# Altium PCB PCB1.PcbDoc (part 1 of 2)
Units mm, origin at the board's own origin, x right, y up, seen from the top; angles counter-clockwise.
Board outline 68.3 x 41 mm, 2 copper layers (Top Layer, Bottom Layer); 84 components, 72 nets, 284 pads, 49 vias.
Unrouted connection lines stored in the file: 26.
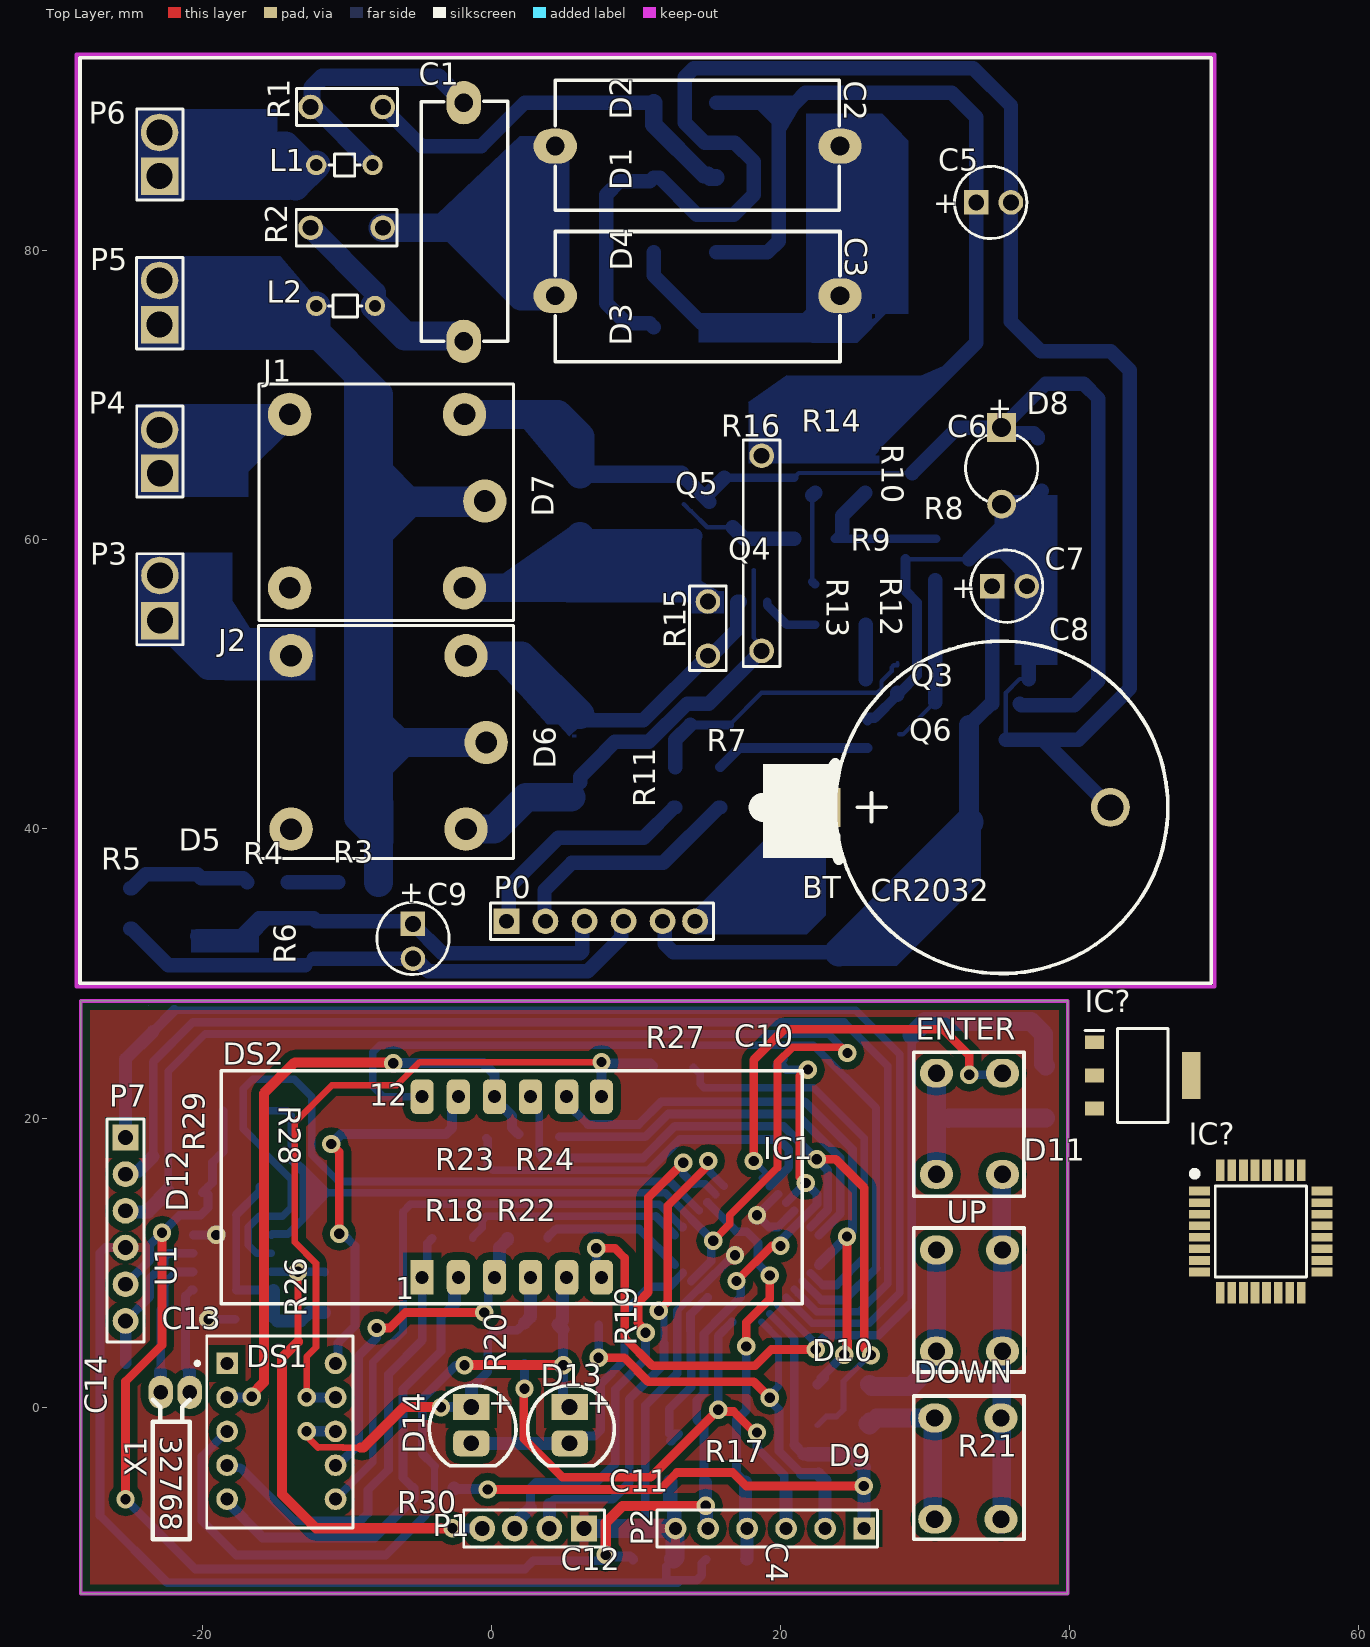
[diagram p0: Top Layer view]
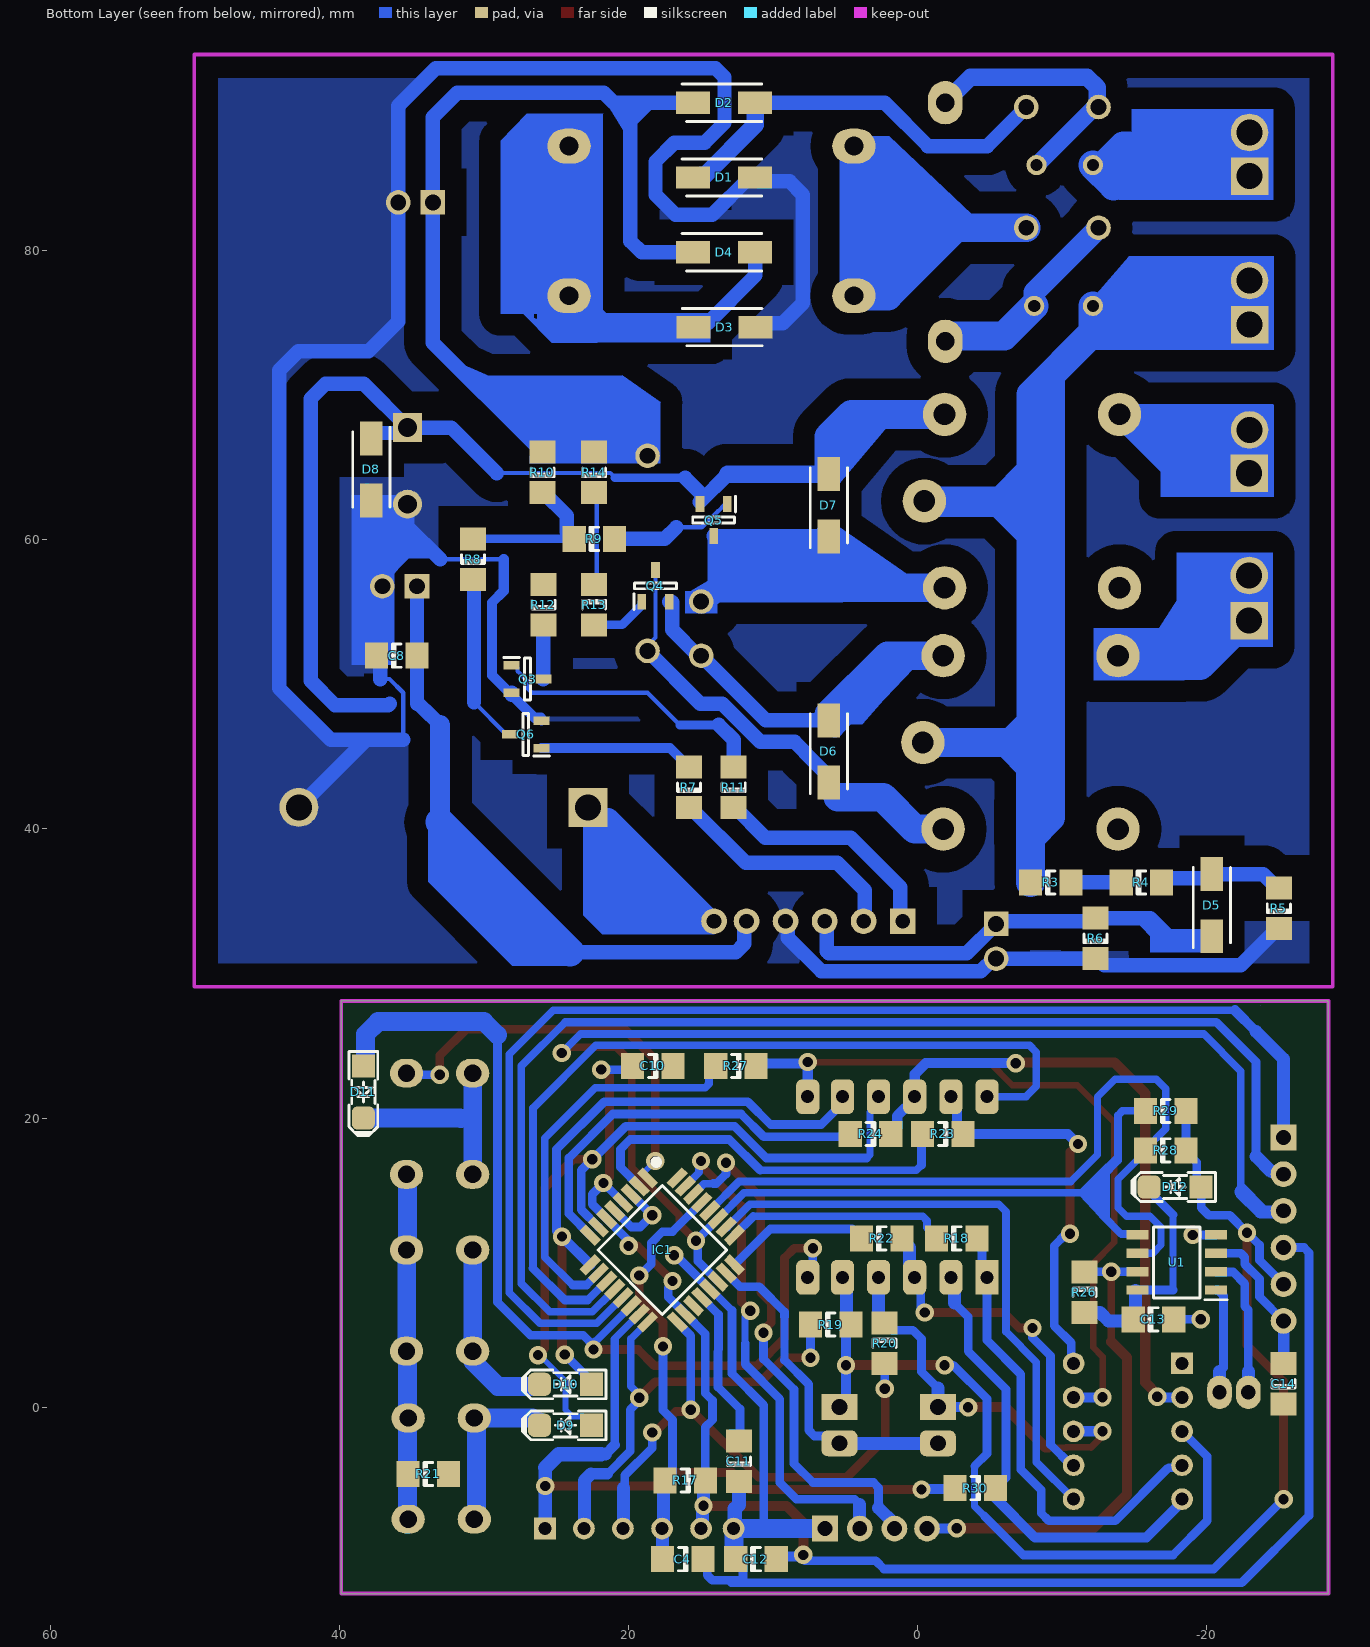
[diagram p1: Bottom Layer view, seen from below]

## Layer stack, top to bottom
Top Solder: solder mask 0.0102, Solder Resist, Dk 3.5
Top Layer: signal copper 0.0356
Dielectric 1: dielectric 0.32, FR-4, Dk 4.8
Bottom Layer: signal copper 0.0356
Bottom Solder: solder mask 0.0102, Solder Resist, Dk 3.5

## Board outline
-28.406,-12.897 -28.406,28.103 39.894,28.103 39.894,-12.897
cut-out: -23.718,27.803

## Design rules (kind name [scope] priority, off if disabled: settings)
Clearance Clearance_8 [InNamedPolygon('GND_L01_P014')] p1: gap=0.508 ignorepadtopadclearanceinfootprint=TRUE
Clearance Clearance_7 [InNamedPolygon('Bottom Layer-No Net')] p2: gap=0.508 ignorepadtopadclearanceinfootprint=TRUE
Clearance Clearance_6 [InNamedPolygon('GND_L02_P008')] p3: gap=1.5 ignorepadtopadclearanceinfootprint=FALSE
Clearance Clearance_5 [InNamedPolygon('GND_L02_P008')] p4: gap=0.254 ignorepadtopadclearanceinfootprint=FALSE except(0: Arc-Hole Track-Hole SMDPad-Hole THPad-Hole Via-Hole Fill-Hole Poly-Hole Region-Hole Text-Hole)
Clearance Clearance_4 [InNamedPolygon('GND_L02_P008')] p5: gap=1.4 ignorepadtopadclearanceinfootprint=FALSE
Clearance Clearance_3 [InNamedPolygon('GND_L02_P008')] p6: gap=0.254 ignorepadtopadclearanceinfootprint=FALSE except(0: Arc-Hole Track-Hole SMDPad-Hole THPad-Hole Via-Hole Fill-Hole Poly-Hole Region-Hole Text-Hole)
Clearance Clearance_2 [InNamedPolygon('GND_L02_P007')] p7: gap=1.4 ignorepadtopadclearanceinfootprint=FALSE
Clearance Clearance_1 [InNamedPolygon('GND_L02_P006')] p8: gap=1.5 ignorepadtopadclearanceinfootprint=FALSE
Clearance [All] p9: gap=0.254 ignorepadtopadclearanceinfootprint=FALSE except(0: Arc-Hole Track-Hole SMDPad-Hole THPad-Hole Via-Hole Fill-Hole Poly-Hole Region-Hole Text-Hole)
PolygonConnect PolygonConnect_4 [All vs IsNamedPolygon('GND_L01_P014')] p1: thpad.connectstyle=Relief thpad.reliefconductorwidth=0.635 thpad.reliefentries=4 thpad.polygonreliefangle="90 Angle" thpad.airgapwidth=0.254 smdpad.connectstyle=Relief smdpad.reliefconductorwidth=0.635 smdpad.reliefentries=4 smdpad.polygonreliefangle="90 Angle" smdpad.airgapwidth=0.254 via.connectstyle=Direct via.reliefconductorwidth=0.254 via.reliefentries=4 via.polygonreliefangle="90 Angle" via.airgapwidth=0.254
PolygonConnect PolygonConnect_3 [All vs IsNamedPolygon('Bottom Layer-No Net 1')] p2: thpad.connectstyle=Relief thpad.reliefconductorwidth=0.635 thpad.reliefentries=4 thpad.polygonreliefangle="90 Angle" thpad.airgapwidth=0.254 smdpad.connectstyle=Relief smdpad.reliefconductorwidth=0.635 smdpad.reliefentries=4 smdpad.polygonreliefangle="90 Angle" smdpad.airgapwidth=0.254 via.connectstyle=Direct via.reliefconductorwidth=0.254 via.reliefentries=4 via.polygonreliefangle="90 Angle" via.airgapwidth=0.254
PolygonConnect PolygonConnect_2 [All vs IsNamedPolygon('Bottom Layer-No Net')] p3: thpad.connectstyle=Relief thpad.reliefconductorwidth=0.635 thpad.reliefentries=4 thpad.polygonreliefangle="90 Angle" thpad.airgapwidth=0.254 smdpad.connectstyle=Relief smdpad.reliefconductorwidth=0.635 smdpad.reliefentries=4 smdpad.polygonreliefangle="45 Angle" smdpad.airgapwidth=0.254 via.connectstyle=Direct via.reliefconductorwidth=0.254 via.reliefentries=4 via.polygonreliefangle="90 Angle" via.airgapwidth=0.254
PolygonConnect PolygonConnect_1 [All vs IsNamedPolygon('GND_L02_P008')] p4: connectstyle=Direct reliefconductorwidth=0.254 reliefentries=4 polygonreliefangle="90 Angle" airgapwidth=0.254
PolygonConnect [All] p5: connectstyle=Relief reliefconductorwidth=0.254 reliefentries=4 polygonreliefangle="90 Angle" airgapwidth=0.254
RoomDefinition Sheet1 [InComponentClass('Sheet1')] p1: confinementstyle=ConfineIn formatcopy=TRUE lockcomponents=FALSE outline 41.021,-11.479 61.647,-11.479 61.647,1.846 41.021,1.846
RoutingVias [All] p1: holewidth=0.711 width=1.27 viastyle="Through Hole" minholewidth=0.711 minwidth=1.27 maxholewidth=0.711 maxwidth=1.27
SolderMaskExpansion [All] p1: expansion=0.102
Width [All] p1: maxlimit=254 minlimit=0.025 preferedwidth=1 minimp=50.000000 maximp=50.000000 favimp=50.000000
30 further rules are at their usual default settings.

## Components (designator, comment, footprint, x,y, rotation, side; value= is the part's Value field where it differs from the comment)
BT "Battery" CR2032 33.81,41.495 r0 top
C1 "Cap" "0.47uf 400v" 1.15,73.317 r90 top value=10nF
C2 "Cap" "1uf 400v"#1 0.078,82.8 r0 top value=330nF
C3 "Cap" "1uf 400v"#2 28.43,81.329 r180 top value=470nF
C4 "Cap" 1206 16.264,-10.522 r0 bottom value=100nF
C5 "Cap Pol1" CAPPR2-5x6.8 34.552,83.345 r0 top value=10uF
C6 "Cap Pol1" CAPPR5-5x5 35.31,64.97 r270 top value=470uF
C7 "Cap Pol1" CAPPR2-5x6.8 35.652,56.795 r0 top value=100uF
C8 "Cap" 1206 36.052,51.985 r180 bottom value=100nF
C9 "Cap Pol1" CAPPR2-5x6.8 -5.418,32.428 r270 top value=47uF
C10 "Cap" 1206 18.344,23.603 r0 bottom value=100nF
C11 "Cap" 1206 12.375,-3.747 r90 bottom value=100nF
C12 "Cap" 1206 11.2,-10.522 r180 bottom value=100nF
C13 "Cap" 1206 -16.3,6.075 r180 bottom value=100pF
C14 "Cap" 1206 -25.3,1.625 r90 bottom value=100nF
D1 "GS1M-LTP" DIOM5226X244N 13.402,85.07 r180 bottom
D2 "GS1M-LTP" DIOM5226X244N 13.402,90.245 r180 bottom
D3 "GS1M-LTP" DIOM5226X244N 13.377,74.72 r180 bottom
D4 "GS1M-LTP" DIOM5226X244N 13.402,79.895 r180 bottom
D5 "GS1M-LTP" DIOM5226X244N -20.343,34.728 r90 bottom
D6 "42A" DIOM5226X244N 6.152,45.37 r90 bottom
D7 "42A" DIOM5226X244N 6.152,62.395 r90 bottom
D8 "38A" DIOM5226X244N 37.808,64.869 r270 bottom
D9 "1N4148" D_SOD80 24.369,-1.256 r0 bottom
D10 "1N4148" D_SOD80 24.369,1.582 r0 bottom
D11 "1N4148" D_SOD80 38.364,21.803 r270 bottom
D12 "1N4148" D_SOD80 -17.798,15.231 r0 bottom
D13 "LED 5mm" LED-1 5.426,-1.397 r0 top
D14 "LED 5mm" LED-1 -1.381,-1.397 r0 top
DOWN "PB-4pin" PB-4pin#1 30.309,-0.372 r270 top
DS1 "Dpy Red-CA" LEDDIP-10/C5.08RHD -15.734,-2.05 r0 top
DS2 "7Segment-4Digit-CA" 7segCA -23.054,4.587 r0 top
ENTER "PB-4pin" PB-4pin#1 30.42,23.483 r270 top
IC1 "ATMEGA168-15AD" QFP80P900X900X120-32N 17.679,10.872 r225 bottom
IC? "AMS1117-3.3" SOT229P700X180-4N 45.075,22.95 r0 top
IC? "STM32F030K6T6TR" QFP80P900X900X160-32N 53.237,12.15 r0 top
J1 "HF3FD_476-583" HF3FD -0.448,62.685 r180 top
J2 "HF3FD_476-583" HF3FD -0.348,45.985 r180 top
L1 "Inductor" AXIAL-0.3#1 -8.299,85.931 r180 top value=100mH
L2 "Inductor" AXIAL-0.3#2 -8.299,76.184 r180 top value=100mH
P0 "Header 6" HDR1X6#1 1.402,33.62 r0 top
P1 "Header 4" HDR1X4 6.989,-8.397 r180 top
P2 "Header 6" HDR1X6#2 25.45,-8.397 r180 top
P3 "Header 2" HDR1X2#1 -22.135,55.155 r90 top
P4 "Header 2" HDR1X2#2 -22.673,64.891 r90 top
P5 "Header 2" HDR1X2#3 -22.948,75.405 r90 top
P6 "Header 2" HDR1X2#4 -22.948,85.641 r90 top
P7 "Header 6" HDR1X6#3 -25.3,18.66 r270 top
Q3 "C945" SOT95P240X110-3N 27.002,50.37 r180 bottom
Q4 "C945" SOT95P240X110-3N 18.152,56.82 r90 bottom
Q5 "C945" SOT95P240X110-3N 14.127,61.37 r270 bottom
Q6 "C945" SOT95P240X110-3N 27.127,46.545 r0 bottom
R1 "47R" RAD-0.1#1 -8.768,89.945 r0 top
R2 "47R" RAD-0.1#1 -11.228,81.595 r180 top
R3 "120k" 1206 -9.193,36.303 r180 bottom
R4 "120k" 1206 -15.468,36.303 r180 bottom
R5 "330k" 1206 -24.968,34.503 r90 bottom
R6 "1.5k" 1206 -12.293,32.428 r90 bottom
R7 "6.8K" 1206 15.841,42.885 r90 bottom
R8 "4.7K" 1206 30.777,58.67 r90 bottom
R9 "6.8K" 1206 22.377,60.07 r180 bottom
R10 "15K" 1206 25.977,64.67 r90 bottom
R11 "6.8K" 1206 12.741,42.885 r90 bottom
R12 "4.7K" 1206 25.902,55.52 r90 bottom
R13 "6.8K" 1206 22.402,55.52 r270 bottom
R14 "15K" 1206 22.402,64.67 r90 bottom
R15 "82R" RAD-0.1#2 14.991,53.255 r270 top
R16 "82R" RAD-0.1#3 18.702,64.447 r90 top
R17 "47K" 1206 16.088,-5.07 r0 bottom
R18 "680R" 1206 -2.681,11.679 r180 bottom
R19 "680R" 1206 6.026,5.71 r180 bottom
R20 "680R" 1206 2.3,4.425 r270 bottom
R21 "2.2K" 1206 33.864,-4.622 r180 bottom
R22 "680R" 1206 2.508,11.679 r180 bottom
R23 "680R" 1206 -1.725,18.9 r0 bottom
R24 "680R" 1206 3.275,18.9 r0 bottom
R26 "4.7K" 1206 -11.524,7.942 r270 bottom
R27 "680R" 1206 12.586,23.602 r0 bottom
R28 "4.7K" 1206 -17.155,17.766 r180 bottom
R29 "4.7K" 1206 -17.155,20.494 r180 bottom
R30 "680R" 1206 -3.981,-5.604 r0 bottom
U1 "DS1340Z-33+" SOIC127P600X175-8N -17.913,10.01 r0 bottom
UP "PB-4pin" PB-4pin#2 29.658,11.253 r270 top
X1 "XTAL" XTAL2 -20.867,1.025 r180 top

## Footprints (in the part's own frame and the unit in brackets; to place one, negate y for a bottom-side part, rotate by r counter-clockwise, add the part's x,y. Pads: shape width x height; smd on the part's side, far side on the other; paste and mask are expansions set on the pad)
"0.47uf 400v" [mm] "18*6mm"
  oval 3x2.4 hole 1.3: 1(0.418,3.048) 2(16.928,3.048)
  silkscreen extent 0.42,0 17.02,6
"1uf 400v"#1 [mm] "24*9mm"
  oval 3x2.4 hole 1.3: 1(4.349,4.445) 2(24.049,4.445)
  silkscreen extent 4.35,0 24,9
"1uf 400v"#2 [mm] "24*9mm"
  oval 3x2.4 hole 1.3: 1(4.303,4.445) 2(24.003,4.445)
  silkscreen extent 4.3,0 24,9
7segCA [mm] "7seg-CA; 12 Leads"
  rect 1.6x2.4 hole 0.9: 1(18.273,4.391)
  rrect50% 1.6x2.4 hole 0.9: 2(20.773,4.391) 3(23.273,4.391) 4(25.773,4.391) 5(28.273,4.391) 6(30.673,4.391) 7(30.673,16.891) 8(28.273,16.891) 9(25.773,16.891) 10(23.273,16.891) 11(20.773,16.891) 12(18.273,16.891)
  silkscreen extent 4.37,2.57 44.57,18.67
1206 [mm] "Chip Capacitor; Body 3.2 x 1.6 mm (LxW typ)"
  rect 1.6x1.8 smd: 1(-1.4,0) 2(1.4,0)
  silkscreen extent -0.3,-0.8 0.3,0.8
AXIAL-0.3#1 [mm] "Axial Device, Thru-Hole; 2 Leads; 0.3 in Pin Spacing"
  round 1.4 hole 0.85: 1(-0.09,0) 2(3.81,0)
  silkscreen extent 0.76,-0.76 2.92,0.76
AXIAL-0.3#2 [mm] "Axial Device, Thru-Hole; 2 Leads; 0.3 in Pin Spacing"
  round 1.4 hole 0.85: 1(-0.254,0) 2(3.81,0)
  silkscreen extent 0.66,-0.76 2.97,0.76
CAPPR2-5x6.8 [mm] "Capacitor, Electrolytic, Radial; Body 5 x 6.8 mm (Dia.xH typ); Pin Spacing 2 mm (typ)"
  rect 1.7x1.7 hole 1.1: 1(-1,0)
  round 1.7 hole 1.1: 2(1.4,0)
  silkscreen extent -2.5,-2.5 2.5,2.5
CAPPR5-5x5 [mm] "Capacitor, Electrolytic, Radial; Body 5 x 5 mm (Dia.xH typ); Pin Spacing 5 mm (typ)"
  rect 2x2 hole 1.3: 1(-2.8,0)
  round 2 hole 1.3: 2(2.5,0)
  silkscreen extent -2.26,-2.5 2.27,2.5
CR2032 [mm] "Battery holder"
  rect 2.7x2.7 hole 1.8: 0(-10.983,0)
  round 2.7 hole 1.8: 1(9.017,0)
  silkscreen extent -15.5,-11.5 13,11.5
D_SOD80 [mm] "SOD-80 MINI-MELF 3.6X1.6mm, LL-34, LL4148"
  rect 1.6x1.6 smd: 1(-1.8,0)
  rrect50% 1.6x1.6 smd: 2(1.8,0)
  Top Layer pour cut-out: -1.016,1.016 1.016,1.016 1.016,-1.016 -1.016,-1.016
  silkscreen extent -2.8,-1 3,1, body extent -1.85,-0.8 1.85,0.8, height 2
DIOM5226X244N [mm]
  rect 2.35x1.55 smd: 1(-2.15,0) 2(2.15,0)
  silkscreen extent -2.93,-1.29 2.6,1.29, body extent -2.6,-1.29 2.6,1.29, height 2.44
HDR1X2#1 [mm] "Connector; Header; 2 Position"
  rect 2.6x2.6 hole 1.8: 1(-0.746,0.788)
  round 2.6 hole 1.8: 2(2.379,0.788)
  silkscreen extent -2.41,-0.81 3.89,2.39
HDR1X2#2 [mm] "Connector; Header; 2 Position"
  rect 2.6x2.6 hole 1.8: 1(-0.282,0.25)
  round 2.6 hole 1.8: 2(2.718,0.275)
  silkscreen extent -1.93,-1.35 4.37,1.85
HDR1X2#3 [mm] "Connector; Header; 2 Position"
  rect 2.6x2.6 hole 1.8: 1(-0.521,0)
  round 2.6 hole 1.8: 2(2.54,0)
  silkscreen extent -2.2,-1.63 4.13,1.6
HDR1X2#4 [mm] "Connector; Header; 2 Position"
  rect 2.6x2.6 hole 1.8: 1(-0.471,0)
  round 2.6 hole 1.8: 2(2.54,0)
  silkscreen extent -2.12,-1.63 4.18,1.57
HDR1X4 [mil] "Connector; Header; 4 Position"
  rect 70x70 hole 40: 1(22.44,0)
  round 70 hole 40: 2(116.93,0) 3(211.42,0) 4(300,0)
  silkscreen extent -33,-50 350,50
HDR1X6#1 [mil] "Connector; Header; 6 Position"
  rect 70x70 hole 40: 1(-13.78,0)
  round 70 hole 40: 2(92.52,0) 3(198.82,0) 4(305.12,0) 5(411.42,0) 6(500,0)
  silkscreen extent -57,-50 550,50
HDR1X6#2 [mil] "Connector; Header; 6 Position"
  rect 59.06x59.06 hole 35.43: 1(-13.78,0)
  round 59.06 hole 35.43: 2(92.52,0) 3(198.82,0) 4(305.12,0) 5(411.42,0) 6(500,0)
  silkscreen extent -50,-50 550,50
HDR1X6#3 [mil] "Connector; Header; 6 Position"
  rect 70x70 hole 40: 1(0,0)
  round 70 hole 40: 2(100,0) 3(200,0) 4(300,0) 5(400,0) 6(500,0)
  silkscreen extent -50,-50 557,50
HF3FD [mm]
  round 3 hole 1.5: 1(1.4,-6) 2(13.5,-6) 3(1.4,6) 4(13.5,6) 5(0,0)
  silkscreen extent -1.98,-8.1 15.62,8.27
LED-1 [mm] "LED; 2 Leads"
  rect 2.5x1.8 hole 1.1: 1(0,1.397)
  rrect50% 2.5x1.8 hole 1.1: 2(0,-1.103)
  silkscreen extent -2.91,-2.67 3.09,2.9
LEDDIP-10/C5.08RHD [mm] "LED, 7-Segment Display, 7.62 mm, RHD; 10 Leads; Row Space 5.08 mm; Pitch 2.54 mm"
  rect 1.5x1.5 hole 0.9: 1(-2.54,5.08)
  round 1.5 hole 0.9: 2(-2.54,2.73) 3(-2.54,0.38) 4(-2.54,-1.97) 5(-2.54,-4.32) 6(4.96,-4.32) 7(4.96,-1.97) 8(4.96,0.38) 9(4.96,2.73) 10(4.96,5.08)
  silkscreen extent -4.72,-6.32 6.16,6.98, body extent -3.95,-6.55 3.95,6.55, height 6.34
PB-4pin#1 [mm] "Switch"
  oval 2x2.3 hole 1.2: 1(0.381,4.953) 2(7.381,4.953) 3(0.381,0.381) 4(7.381,0.381)
  silkscreen extent -1.14,-1.08 8.76,6.54
PB-4pin#2 [mm] "Switch"
  oval 2x2.3 hole 1.2: 1(0.381,5.715) 2(7.381,5.715) 3(0.381,1.143) 4(7.381,1.143)
  silkscreen extent -1.14,-0.43 8.83,7.19
QFP80P900X900X120-32N [mm]
  rect 1.5x0.6 smd: 1(-4.25,2.8) 2(-4.25,2) 3(-4.25,1.2) 4(-4.25,0.4) 5(-4.25,-0.4) 6(-4.25,-1.2) 7(-4.25,-2) 8(-4.25,-2.8) 17(4.25,-2.8) 18(4.25,-2) 19(4.25,-1.2) 20(4.25,-0.4) 21(4.25,0.4) 22(4.25,1.2) 23(4.25,2) 24(4.25,2.8)
  rect 0.6x1.5 smd: 9(-2.8,-4.25) 10(-2,-4.25) 11(-1.2,-4.25) 12(-0.4,-4.25) 13(0.4,-4.25) 14(1.2,-4.25) 15(2,-4.25) 16(2.8,-4.25) 25(2.8,4.25) 26(2,4.25) 27(1.2,4.25) 28(0.4,4.25) 29(-0.4,4.25) 30(-1.2,4.25) 31(-2,4.25) 32(-2.8,4.25)
  silkscreen extent -4.8,-3.15 3.15,4.2, body extent -4.5,-4.5 4.5,4.5, height 1.2
QFP80P900X900X160-32N [mm]
  rect 1.475x0.6 smd: 1(-4.238,2.8) 2(-4.238,2) 3(-4.238,1.2) 4(-4.238,0.4) 5(-4.238,-0.4) 6(-4.238,-1.2) 7(-4.238,-2) 8(-4.238,-2.8) 17(4.238,-2.8) 18(4.238,-2) 19(4.238,-1.2) 20(4.238,-0.4) 21(4.238,0.4) 22(4.238,1.2) 23(4.238,2) 24(4.238,2.8)
  rect 0.6x1.475 smd: 9(-2.8,-4.238) 10(-2,-4.238) 11(-1.2,-4.238) 12(-0.4,-4.238) 13(0.4,-4.238) 14(1.2,-4.238) 15(2,-4.238) 16(2.8,-4.238) 25(2.8,4.238) 26(2,4.238) 27(1.2,4.238) 28(0.4,4.238) 29(-0.4,4.238) 30(-1.2,4.238) 31(-2,4.238) 32(-2.8,4.238)
  silkscreen extent -4.77,-3.15 3.15,4.2, body extent -4.5,-4.5 4.5,4.5, height 1.6
RAD-0.1#1 [mm] "Radial Cap, Thru-Hole; 2 Leads; 0.1 in Pin Spacing"
  round 1.7 hole 1.1: 1(-3.73,0) 2(1.27,0)
  silkscreen extent -4.7,-1.27 2.29,1.27
RAD-0.1#2 [mm] "Radial Cap, Thru-Hole; 2 Leads; 0.1 in Pin Spacing"
  round 1.7 hole 1.1: 1(-2.48,0) 2(1.27,0)
  silkscreen extent -3.56,-1.27 2.29,1.27
RAD-0.1#3 [mm] "Radial Cap, Thru-Hole; 2 Leads; 0.1 in Pin Spacing"
  round 1.7 hole 1.1: 1(-12.127,0) 2(1.373,0)
  silkscreen extent -13.2,-1.27 2.45,1.27
SOIC127P600X175-8N [mm]
  rect 1.525x0.65 smd: 1(-2.712,1.905) 2(-2.712,0.635) 3(-2.712,-0.635) 4(-2.712,-1.905) 5(2.712,-1.905) 6(2.712,-0.635) 7(2.712,0.635) 8(2.712,1.905)
  silkscreen extent -3.47,-2.45 1.6,2.58, body extent -3,-2.45 3,2.45, height 1.75
SOT95P240X110-3N [mm]
  rect 1.1x0.6 smd: 1(-1.1,0.95) 2(-1.1,-0.95) 3(1.1,0)
  silkscreen extent -1.65,-1.45 0.2,1.5, body extent -1.2,-1.45 1.2,1.45, height 1.1
SOT229P700X180-4N [mm]
  rect 1.3x0.95 smd: 1(-3.35,2.29) 2(-3.35,0) 3(-3.35,-2.29)
  rect 1.3x3.25 smd: 4(3.35,0)
  silkscreen extent -4,-3.25 1.75,3.25, body extent -3.5,-3.25 3.5,3.25, height 1.8
XTAL2 [mm]
  oval 1.7x2.3 hole 1: 1(0,0) 2(2,0)
  silkscreen extent 0,0.51 2.54,10.16

## Part data
BT: library part "Battery holder", "Battery holder CR2032", ComponentLinkURL=www.picpars.com, Designer="Seyed Mohsen Ghasemian", E-mail=picpars@gmail.com, Make=02/12/2011
C1 C2 C3 C4 C8 C10 C11 C12 C13 C14: "Capacitor", LatestRevisionDate=17-Jul-2002, LatestRevisionNote="Re-released for DXP Platform.", PackageDescription="Radial Cap, Thru-Hole; 2 Leads; 0.3 in Pin Spacing", PackageReference=RAD-0.3, Published=8-Jun-2000, Publisher="Altium Limited"
C5 C6 C7 C9: "Polarized Capacitor (Radial)", LatestRevisionDate=17-Jul-2002, LatestRevisionNote="Re-released for DXP Platform.", PackageDescription="Polarized Capacitor (Radial); 2 Leads", PackageReference=RB7.6-15, Published=8-Jun-2000, Publisher="Altium Limited"
D1 D2 D3 D4 D5: "Diode", Manufacturer_Name="Micro Commercial Components (MCC)", Mouser Part Number=833-GS1M-LTP, Arrow Part Number=GS1M-LTP, Arrow Price/Stock=https://www.arrow.com/en/products/gs1m-ltp/micro-commercial-components, Datasheet Link=https://componentsearchengine.com/Datasheets/2/GS1M-LTP.pdf, Height=2.44mm, Manufacturer_Part_Number=GS1M-LTP, Mouser Price/Stock=https://www.mouser.co.uk/ProductDetail/Micro-Commercial-Components-MCC/GS1M-LTP?qs=SdqRYZZ9IxCJVysXrjUefQ%3D%3D
D6 D7 D8: library part GS1M-LTP, "Diode", Manufacturer_Name="Micro Commercial Components (MCC)", Mouser Part Number=833-GS1M-LTP, Arrow Part Number=GS1M-LTP, Arrow Price/Stock=https://www.arrow.com/en/products/gs1m-ltp/micro-commercial-components, Datasheet Link=https://componentsearchengine.com/Datasheets/2/GS1M-LTP.pdf, Height=2.44mm, Manufacturer_Part_Number=GS1M-LTP, Mouser Price/Stock=https://www.mouser.co.uk/ProductDetail/Micro-Commercial-Components-MCC/GS1M-LTP?qs=SdqRYZZ9IxCJVysXrjUefQ%3D%3D
D9 D10 D11 D12: library part DIODE_SMD_1N4148, "DIODE, FAST SWTICHING, 0.3A, 0.5W", =http://www.chila.ir, ASSEMBLY=ASSEMBLY, DESC=DESCRIPTION, MANF=MANF, MANF_P#=1N4148, PARAM=75V, PARAM2="300mA, 0.5W", PRICE=PRICE
D13 D14: "Typical LED", Designer="Seyed Mohsen Ghasemian", PackageDescription="LED; 2 Leads", PackageReference=LED, Published=07/31/2012, Publisher=www.picpars.com
DOWN ENTER UP: "Switch", Designer="Seyed Mohsen Ghasemian", E-mail=picpars@gmail.com, Publisher=www.picpars.com, WEB=www.picpars.com
DS1: "7.62 mm Black Surface HER 7-Segment Display: CA, RH DP", Colour="High Efficiency Red (HER)", ComponentLink1Description="Manufacturer Link", ComponentLink1URL=http://www.agilent.com/, DatasheetVersion=19-Feb-2002, LatestRevisionDate=17-Dec-2003, LatestRevisionNote="Schematic revised, PCB Footprint replaced.", MinimumIntensity="360 ucd", Note="IF = 5 mA", PackageReference=LEDDIP-10, PackageVersion=19-Feb-2002, Published=8-Jun-2000, Publisher="Altium Limited"
DS2: library part 7Seg-4Digit-CA, "7-Segment Display: CA", Colour=Read, ComponentLink1URL=http://www.picpars.com/, Designer="Seyed Mohsen Ghasemain", Published=07/31/2012, Publisher=www.picpars.com
IC1: "Integrated Circuit", Manufacturer_Name=Microchip, Mouser Part Number=556-ATMEGA168-15AD, Datasheet Link=https://componentsearchengine.com/Datasheets/2/ATMEGA168-15AD.pdf, Height=1.2mm, Manufacturer_Part_Number=ATMEGA168-15AD, Mouser Price/Stock=https://www.mouser.com/Search/Refine.aspx?Keyword=556-ATMEGA168-15AD
IC?: "Integrated Circuit", Manufacturer_Name="Advanced Monolithic Systems", Datasheet Link=http://www.advanced-monolithic.com/pdf/ds1117.pdf, Height=1.8mm, Manufacturer_Part_Number=AMS1117-3.3
IC?: "Integrated Circuit", Manufacturer_Name=STMicroelectronics, Mouser Part Number=511-STM32F030K6T6TR, Arrow Part Number=STM32F030K6T6TR, Arrow Price/Stock=https://www.arrow.com/en/products/stm32f030k6t6tr/stmicroelectronics, Datasheet Link=http://www.st.com/content/ccc/resource/technical/document/datasheet/a4/5d/0b/0e/87/c4/4d/71/DM00088500.pdf/files/DM00088500.pdf/jcr:content/translations/en.DM00088500.pdf, Height=1.6mm, Manufacturer_Part_Number=STM32F030K6T6TR, Mouser Price/Stock=https://www.mouser.co.uk/ProductDetail/STMicroelectronics/STM32F030K6T6TR?qs=9MuLHSklicort60U4QZudQ%3D%3D
J1 J2: "Connector", Manufacturer_Name="RS Components", Manufacturer_Part_Number="HF3FD 476-583", Datasheet Link=http://it.rs-online.com/web/p/rele-monostabili/0476583/
P0 P2 P7: "Header, 6-Pin", LatestRevisionDate=17-Jul-2002, LatestRevisionNote="Re-released for DXP Platform.", Publisher="Altium Limited"
P1: "Header, 4-Pin", LatestRevisionDate=17-Jul-2002, LatestRevisionNote="Re-released for DXP Platform.", Publisher="Altium Limited"
P3 P4 P5 P6: "Header, 2-Pin", LatestRevisionDate=17-Jul-2002, LatestRevisionNote="Re-released for DXP Platform.", Publisher="Altium Limited"
Q3 Q4 Q5 Q6: "Transistor", Manufacturer_Name=Shikues, Datasheet Link=https://datasheet.lcsc.com/szlcsc/2001131004_Shikues-C945_C475659.pdf, Height=1.1mm, Manufacturer_Part_Number=C945
R1 R2 R3 R4 R5 R6: library part "RES Axial 3W", "RES Axial 3W", Data=4-1-2017, Desc.="RES Axial 3W", Designer="Abbas Basereh"
R7 R8 R9 R10 R11 R12 R13 R14 R15 R16 R17 R18 R19 R20 R21 R22 R23 R24 R26 R27 R28 R29 R30: library part "RES 0805 0.125W", "RES 0805", Data=16-12-2016, Desc.="RES SMD 0805", Designer="Abbas Basereh"
U1: "Undefined or Miscellaneous", Manufacturer_Name="Maxim Integrated", Mouser Part Number=700-DS1340Z-33, Datasheet Link=https://componentsearchengine.com/Datasheets/2/DS1340Z-33+.pdf, Height=1.75mm, Manufacturer_Part_Number=DS1340Z-33+, Mouser Price/Stock=https://www.mouser.co.uk/ProductDetail/Maxim-Integrated/DS1340Z-33%2b?qs=0Y9aZN%252BMVCUptkgl4y27CA%3D%3D
L1 L2: Code_IEC=1005, Code_JEITA=0402, LatestRevisionDate=29-May-2009, LatestRevisionNote="IPC-7351 Footprint Added.", PackageDescription="Chip Inductor", PackageReference=0402-A, Published=8-Jun-2000, Publisher="Altium Limited"

## Via types
v1: diameter 1.27, hole 0.711, Top Layer to Bottom Layer, 49 vias

## Nets (pads, with @x,y where several pads share a name; then routed paths per layer and width w, separated by ;. In a path a pad name is that pad's centre, name@x,y a point inside that pad or via, vN(x,y) a via of type N, cw(c..) or ccw(c..) an arc to the next point about the centre after c; other vN are vias at no path point)
1: ENTER.1 IC1.1 | length 28
  Top Layer w0.6: v1(18.163,17.029) 18.163,24.041 20.275,26.153 31.25,26.153 33.073,24.33 v1(33.073,22.987)
  Bottom Layer w0.4: v1(18.163,17.029) 18.949,16.243 18.949,16.102 IC1.1 ; ENTER.1@35.357,23.086 ENTER.1
  Bottom Layer w0.6: v1(33.073,22.987) ENTER.1@34.547,22.987
7: D9.1 DS2.9 IC1.7 | length 54.3
  Top Layer w0.6: v1(22.526,17.153) 23.839,17.153 25.805,15.187 25.805,4.072 v1(26.276,3.6)
  Bottom Layer w0.4: D9.1 23.169,-0.656 23.889,-0.656 24.369,-0.175 24.369,1.789 26.18,3.6 v1(26.276,3.6)
  Bottom Layer w0.5: DS2.9@3.176,21.021 DS2.9 2.719,20.997 3.319,20.397 3.319,17.453 3.536,17.236
  Bottom Layer w0.6: 3.536,17.236 10.497,17.236 12.685,19.424 20.213,19.424 22.484,17.153 v1(22.526,17.153) 23.289,16.39 23.289,13.654 IC1.7
9: D10.1 DS2.8 IC1.9 | length 43.2
  Top Layer w0.6: v1(24.424,3.637) v1@24.616,3.829 ; 24.616,4.557 v1(24.616,11.799)
  Top Layer w0.7: v1@24.616,3.829 24.616,4.557
  Bottom Layer w0.6: DS2.8 5.219,21.024 6.686,19.557 10.189,19.557 11.764,21.132 21.698,21.132 24.997,17.833 24.997,12.18 v1@24.706,11.889 ; D10.1@23.019,2.032 22.818,2.032 v1(24.424,3.637)
  Bottom Layer w0.7: D10.1 D10.1@23.019,2.032 ; IC1.9 v1(24.616,11.799)
  Bottom Layer w0.8: v1(24.616,11.799) v1@24.706,11.889
11: DS2.12 IC1.11 | length 60.5
  Bottom Layer w0.53: DS2.12 -7.478,21.478 -8.2,22.2 -8.2,24.55 -7.721,25.029 22.288,25.029 26.621,20.696 26.621,9.599
  Bottom Layer w0.55: IC1.11 22.84,7.407
  Bottom Layer w0.6: 22.84,7.407 24.429,7.407 26.621,9.599
14: D11.1 DS2.6 IC1.14 | length 67.4
  Top Layer w0.6: v1(7.262,10.984) 8.559,10.984 9.225,10.318 9.225,4.78 11.133,2.872 18.244,2.872 19.361,3.989 v1(22.44,3.989)
  Bottom Layer w0.508: IC1.14 22.294,4.559 22.294,4.135 v1(22.44,3.989)
  Bottom Layer w0.6: v1(7.262,10.984) 7.262,9.335 DS2.6 ; v1@22.294,4.559 22.44,4.414 22.44,4.256 23.169,4.985 26.81,4.985 29.084,7.259 29.084,25.74
  Bottom Layer w1.3: 29.084,25.74 30.015,26.671 37.346,26.671 38.214,25.803 38.214,23.753 D11.1
23: D13.2 D14.2 IC1.23 | length 23.3
  Bottom Layer w0.55: 9.225,3.261 9.225,6.253
  Bottom Layer w0.6: D13.2 5.933,-1.993 7.169,-1.993 7.554,-1.607 7.554,1.59 9.225,3.261 ; 9.225,6.253 9.225,6.587 10.964,8.326 12.305,8.326 IC1.23
  Bottom Layer w0.9: D14.2 D13.2
26: DS1.6 IC1.26 | length 42
  Bottom Layer w0.53: DS1.6 -8.2,-3.796 -8.2,3.115 -6.1,5.215 -6.1,13.517 -5.586,14.031 11.598,14.031
  Bottom Layer w0.55: 11.615,14.031 IC1.26@13.183,12.463
  Bottom Layer w0.6: IC1.26@13.183,12.463 IC1.26
28: IC1.28 R28.1 U1.6 | length 54.1
  Bottom Layer w0.5: U1.6 -16.243,10.645 -16.816,11.219 -16.816,12.443 -16.054,13.205 -14.438,13.205 -13.848,13.796 -13.848,15.759 -15.755,17.666 R28.1 -15.755,17.866 -17.155,19.266 -17.155,22.023 -16.5,22.678 -13.634,22.678 -12.424,21.468 -12.424,17.466 -10.568,15.61
  Bottom Layer w0.53: -10.568,15.61 12.375,15.61
  Bottom Layer w0.55: 12.375,15.61 IC1.28
a: DS1.10 IC1.2 R23.1 | length 27.8
  Top Layer w0.6: v1(-11.074,18.202) -11.074,18.2 -10.525,17.651 v1(-10.525,12)
  Bottom Layer w0.6: DS1.10 -10.602,3.202 -10.602,4.448 -9.425,5.625 -9.425,11.155 -10.27,12 v1(-10.525,12) v1@-10.525,11.927
  Bottom Layer w0.7: v1(-11.074,18.202) -10.376,18.9 R23.1 -2.703,19.322 -2.703,21.056 -2.281,21.478
b: DS1.9 DS2.7 R27.1 | length 50.6
  Top Layer w0.45: v1(-12.775,0.68) -12.775,3.488 -12.124,4.139 -12.124,9.944 -13.585,11.404 -13.585,19.719 -11.025,22.278 -6.535,22.278 -4.938,23.875 v1(7.625,23.875)
  Bottom Layer w0.7: v1(-12.775,0.68) DS1.9 ; DS2.7 v1@7.619,23.602 ; v1(7.625,23.875) 7.734,23.766 11.023,23.766 R27.1
c: D14.1 DS1.8 DS2.4 R20.1 | length 26.2
  Top Layer w0.45: -11.984,-2.791 -10.265,-2.791 -10.256,-2.8 -9.025,-2.8
  Top Layer w0.5: v1@-12.775,-2 -11.984,-2.791
  Top Layer w0.7: -9.025,-2.8 -8.85,-2.8 -6.05,0 v1(-3.475,0)
  Bottom Layer w0.6: -1.381,1.325 -0.248,2.458 -0.248,4.733 0.343,5.325 1.8,5.325 R20.1
  Bottom Layer w0.7: v1(-12.775,-1.67) DS1.8 ; v1@-3.281,0 D14.1
  Bottom Layer w0.9: D14.1 -1.381,1.325 ; R20.1 2.719,6.244 DS2.4
d: DS1.5 DS2.2 R30.1 | length 32.4
  Bottom Layer w0.6: R30.1 -6.1,-4.885 -6.1,1.235 -3.475,3.86 -3.475,6.253 -2.533,7.195
  Bottom Layer w0.7: DS1.5 -18.274,-6.55 -15.806,-9.018 -8.096,-9.018 -5.381,-6.303 R30.1
  Bottom Layer w0.9: -2.533,7.195 -2.533,8.726 DS2.2
DP: DS1.7 DS2.3 R22.2 | length 24.5
  Top Layer w0.6: v1(-7.931,5.475) -7.019,5.475 -5.944,6.55 v1(-0.481,6.55)
  Bottom Layer w0.6: DS1.7@-10.612,-4.02 -9.175,-2.583 -9.175,3.55 -7.931,4.794 v1(-7.931,5.475) ; v1(-0.481,6.55) -0.197,6.834 -0.197,8.562 DS2.3
  Bottom Layer w0.9: DS1.7 DS1.7@-10.612,-4.02 ; DS2.3 0.569,9.328 0.569,11.04 1.108,11.579 R22.2
e: DS1.4 DS2.1 R18.2 | length 32.4
  Bottom Layer w0.6: DS1.4 -18.102,-4.192 -17.358,-4.192 -17.325,-4.225 -17.295,-4.225 -13.665,-7.855 -9.056,-7.855 -8.525,-7.324 -8.525,-5.72 -7.115,-4.31 -7.115,2.285 -4.781,4.619 DS2.1 -4.431,9.328 -4.431,11.329 R18.2
f: DS1.2 IC1.8 R24.1 | length 44.8
  Top Layer w0.7: v1(-16.568,0.725) -16.568,0.879 -15.734,1.713 -15.734,21.706 -13.585,23.855 v1@-6.772,23.855
  Bottom Layer w0.7: DS1.2 v1@-16.75,0.68 ; v1(-6.775,23.8) -0.546,23.8 0.219,23.035 0.219,21.478 0.219,21.358 1.425,20.152 1.425,19.35 R24.1
g: D13.1 DS1.3 DS2.5 R19.2 | length 53.4
  Top Layer w0.7: v1(-1.848,2.905) v1(4.976,2.905)
  Bottom Layer w0.5: -4.581,-7.508 -3.925,-6.852 -3.925,-4.078
  Bottom Layer w0.6: DS1.3 -20.017,-3.413 -20.017,-7.855 -17.647,-10.225 -7.298,-10.225 -4.581,-7.508 ; -3.925,-4.078 -4.781,-3.222 -4.781,0.574 -2.45,2.905 v1(-1.848,2.905)
  Bottom Layer w0.7: D13.1@4.976,0.45 v1(4.976,2.905) R19.2@4.976,5.36
  Bottom Layer w0.9: D13.1@4.976,0.45 D13.1 ; R19.2@4.976,5.36 R19.2 4.923,6.007 4.923,8.682 DS2.5
GND: BT.1 C4.1 C5.2 C6.2 C7.2 C8.1 C9.2 C10.1 C11.1 C12.1 C13.2 C14.1 D1.2 D3.2 D8.2 IC1.3 IC1.5 IC1.21 IC?.1@41.725,25.24 IC?.16 IC?.31 IC?.32 P0.4 P1.1 P2.6 P7.4 Q3.2 Q6.2 R5.1 R6.1 R21.2 U1.4 | length 313.1
  Bottom Layer w0.3: 19.153,12.509 19.199,12.463 ; 28.652,58.67 33.052,58.67 ; 35.602,46.17 35.602,49.42 36.552,50.37 37.186,50.37 ; 38.083,46.17 38.152,46.17
  Bottom Layer w0.53: 12.875,6.71 IC1.21@14.314,8.15
  Bottom Layer w0.6: P7.4 -26.712,11.04 -27.063,10.689 -27.063,-7.503 -22.416,-12.151 12.899,-12.151 ; U1.4 -18.829,11.915 v1@-18.814,11.929 ; v1(-19.568,6.075) C13.2 ; 10.664,-8.397 10.664,0.124 12.863,2.323 12.863,6.71 12.875,6.71 ; C12.1 12.1,-11.022 12.1,-11.971 12.095,-11.976 14.216,-11.976 14.567,-11.625 14.567,-10.819 C4.1 ; IC1.21 16.688,10.447 v1@16.688,10.589 ; 19.153,12.509 v1(18.386,13.276) IC1.3 ; 19.199,12.463 19.835,12.463 IC1.5
  Bottom Layer w0.7: Q6.2 26.027,47.645 26.077,47.695 26.527,47.695 Q3.2@28.102,49.27 ; Q3.2 28.252,49.42 29.457,50.625 29.457,55.671 28.652,56.477 28.652,58.67
  Bottom Layer w1: R5.1 -24.868,33.103 -22.343,30.578 R6.1@-12.882,30.578 ; R6.1 C9.2 -5.228,31.028 -4.349,30.149 6.671,30.149 9.003,32.481 9.003,33.471 P0.4 ; D3.2 10.952,74.995 9.341,74.995 7.957,76.378 7.957,83.878 8.874,84.795 10.977,84.795 D1.2 11.652,85.07 14.227,82.495 16.768,82.495 18.152,83.878 18.152,86.172 16.846,87.478 14.757,87.478 13.377,88.859 13.377,92.003 14.002,92.628 33.357,92.628 35.957,90.028 35.957,83.35 C5.2 35.952,75.109 38.007,73.053 42.857,73.053 44.177,71.734 44.177,49.72 40.627,46.17 38.152,46.17 BT.1 ; C11.1 12.375,-6.753 12.654,-7.032 12.654,-8.301 P2.6 ; Q3.2@28.102,49.27 Q3.2 ; 33.052,58.67 35.31,60.928 C6.2@35.31,62.199 ; 35.602,46.17 38.083,46.17 ; 37.186,50.37 37.186,51.719 C8.1 37.186,52.251 37.186,56.661 C7.2 37.052,60.457 C6.2@35.31,62.199 ; D8.2@38.083,63.394 37.808,63.119 D8.2 37.683,62.594 35.434,62.594 C6.2 C6.2@35.31,62.199
  Bottom Layer w1.3: P1.1 10.664,-8.397 P2.6 12.712,-8.435 12.712,-10.41 C12.1
  other v1: 16.864,10.518 -19.024,11.915
NC1: J1.4
NC2: J2.4
NetC1_1: C1.1 L2.1 R2.2 | length 14.5
  Bottom Layer w1.5: R2.2 -8.045,77.142 L2.1
  Bottom Layer w2: L2.1 -5.973,74.111 -2.083,74.111 -1.898,73.927 C1.1
NetC1_2: C1.2 L1.1 R1.1 | length 18.9
  Bottom Layer w1.2: L1.1 -12.223,89.945 R1.1 -12.403,90.04 -12.403,91.3 -11.7,92.003 -3.643,92.003 -1.898,90.259 C1.2
NetC2_1: C2.1 C3.2 R2.1 | length 24.2
  Bottom Layer w2: R2.1 -2.634,81.595 2.077,76.884 C3.2 C2.1
NetC2_2: C2.2 C3.1 D3.1 D4.2 | length 27.2
  Bottom Layer w1: D4.2 11.252,78.292 14.549,74.995 14.852,74.995 15.127,74.72 D3.1
  Bottom Layer w1.7: D3.1 21.963,74.72
  Bottom Layer w2: 21.963,74.72 C3.1
  Bottom Layer w4.5: C3.1 24.127,81.328 C2.2
NetC6_1: C6.1 D7.2 D8.1 IC?.3@41.725,20.66 J1.1 Q5.2 | length 80.8
  Bottom Layer w0.3: 20.952,64.303 21.272,64.624 29.136,64.624
  Bottom Layer w0.6: 16.107,64.303 20.952,64.303
  Bottom Layer w0.7: Q5.2 15.077,62.62 15.077,63.272
  Bottom Layer w1: 13.152,64.545 Q5.2@15.077,62.62 ; 15.077,63.272 16.107,64.303 ; 29.136,64.624 32.282,67.77 C6.1 ; 36.552,48.67 36.652,48.57 40.324,48.57 42.007,50.253 42.007,69.778 40.982,70.803 38.343,70.803 C6.1 ; D8.1 37.808,67.119 37.533,67.394 35.685,67.394 C6.1
  Bottom Layer w1.2: D7.2 13.152,64.545
  Bottom Layer w2: J1.1 4.598,68.685 6.152,67.131 D7.2
NetC11_2: C11.2 IC1.20 | length 12
  Bottom Layer w0.6: C11.2 12.475,-2.347 12.975,-1.847 12.305,-1.847 12.305,-0.13 13.828,1.394 13.79,6.417 IC1.20
NetC13_1: C13.1 D12.2 R26.2 U1.8 | length 16.1
  Bottom Layer w0.5: -17.647,8.105 -17.647,13.304
  Bottom Layer w0.6: -17.647,8.105 U1.8 -15.075,8.105 U1.8@-15.05,8.08 ; -17.647,13.304 -15.998,14.952 D12.2 ; C13.1@-15.05,6.225 C13.1 C13.1@-14.785,5.96
  Bottom Layer w0.9: C13.1@-15.05,6.225 U1.8@-15.05,8.08 ; C13.1@-14.785,5.96 -13.193,5.96 -12.611,6.542 R26.2
NetD1_1: D1.1 D2.2 R1.2 | length 28.5
  Bottom Layer w1: R1.2 -4.798,87.245 -0.698,87.245 2.302,90.245 D2.2
  Bottom Layer w1.2: D2.2 11.252,88.709 14.716,85.245 14.977,85.245 15.152,85.07 D1.1
NetD5_2: D5.2 R4.2 R5.2 | length 8.7
  Bottom Layer w1: R5.2 -24.868,35.903 -23.893,36.878 D5.2 -20.343,36.866 -20.068,36.591 -17.155,36.591 R4.2
NetD6_1: D6.1 J2.3 Q4.3 R16.1 | length 31.9
  Bottom Layer w0.3: D6.1@5.527,42.195 6.152,42.82 D6.1 ; Q4.3 18.152,53.249 18.702,52.699 R16.1
  Bottom Layer w1: D6.1 6.152,43.62 7.841,45.309 7.841,45.336 8.532,46.028 10.903,46.028 13.545,48.67 15.052,48.67 R16.1
  Bottom Layer w2: J2.3 0.202,39.985 2.412,42.195 D6.1@5.527,42.195
NetD6_2: D6.2 J2.1 Q4.2 R15.2 | length 25.5
  Bottom Layer w1: D6.2@6.152,47.92 D6.2 10.526,47.52 R15.2 15.207,51.985 17.002,53.779 17.002,55.67 17.052,55.72 Q4.2
  Bottom Layer w2: J2.1 2.087,51.985 D6.2@6.152,47.92
NetD7_1: D7.1 J1.3 Q5.3 R15.1 | length 19.1
  Bottom Layer w1: D7.1 6.164,60.257 14.114,60.257 Q5.3
  Bottom Layer w2: J1.3 5.467,56.685 6.152,57.37 D7.1
NetD9_2: D9.2 DOWN.3 DOWN.4 | length 11.9
  Bottom Layer w1.3: D9.2@26.052,-1.153 D9.2@26.179,-1.027 ; D9.2 26.672,-0.753 DOWN.3 ; DOWN.4@30.54,-7.772 DOWN.3@30.54,-0.772
NetD10_2: D10.2 UP.3 UP.4 | length 12.8
  Bottom Layer w1.3: D10.2 26.319,1.432 29.065,1.432 30.801,3.168 UP.4 UP.3@30.801,10.382 ; UP.3@30.651,10.872 UP.3
NetD11_2: D11.2 ENTER.3 ENTER.4 | length 13.5
  Bottom Layer w1.3: ENTER.4 30.801,19.702 ; 30.801,19.953 ENTER.3 ; 31.63,19.953 31.68,20.003 D11.2
NetDOWN_1: DOWN.1 DOWN.2 ENTER.2 R21.1 UP.1 UP.2 | length 24
  Bottom Layer w1.3: DOWN.2@35.317,-7.753 35.317,-4.622 35.317,-0.753 UP.2@35.317,3.872 ; UP.1@35.317,10.872 ENTER.2@35.317,16.102 ; UP.2@35.354,3.872 UP.1@35.354,10.872
  Bottom Layer w2: DOWN.2 DOWN.2@35.317,-7.753 ; ENTER.2@35.317,16.102 ENTER.2
NetDS2_10: DS2.10 R24.2
NetDS2_11: DS2.11 R23.2
NetIC1_10: IC1.10 R27.2 | length 27.3
  Bottom Layer w0.53: R27.2@13.986,23.502 14.452,23.037 14.452,22.37 14.72,22.102 22.323,22.102 25.816,18.608 25.816,10.383 23.883,8.45
  Bottom Layer w0.55: IC1.10 22.929,8.45
  Bottom Layer w0.6: 22.929,8.45 23.883,8.45
NetIC1_24: IC1.24 R22.1 | length 10.1
  Bottom Layer w0.6: R22.1 3.908,11.779 4.408,12.279 4.508,12.279 4.549,12.321 10.219,12.321 IC1.24
NetIC1_25: IC1.25 R18.1 | length 15.5
  Bottom Layer w0.53: R18.1 -1.281,11.779 -0.633,12.427 -0.633,12.904 -0.331,13.205 11.385,13.205
  Bottom Layer w0.58: 11.385,13.205 IC1.25
NetQ3_1: Q3.1 R11.2 | length 20
  Bottom Layer w0.3: 16.477,47.195 18.702,49.42 26.702,49.42 27.002,49.72 27.002,50.22 27.702,50.92 27.702,51.17 27.852,51.32 Q3.1 Q3.1@28.102,51.47
  Bottom Layer w0.6: 13.766,47.195 16.477,47.195
  Bottom Layer w1: R11.2 12.741,46.17 13.766,47.195
NetQ3_3: Q3.3 R12.1 | length 3.8
  Bottom Layer w1: Q3.3 R12.1
NetQ4_1: Q4.1 R13.2 | length 4.1
  Bottom Layer w0.6: Q4.1 19.102,55.47 20.452,54.12 R13.2
NetQ5_1: Q5.1 R9.2 | length 8.6
  Bottom Layer w0.3: Q5.1@13.327,62.47 13.827,61.97 13.848,61.97 14.948,60.87 16.702,60.87
  Bottom Layer w1: 16.702,60.87 17.502,60.07 R9.2
NetQ6_1: Q6.1 R7.2 | length 10.7
  Bottom Layer w0.7: R7.2 17.151,45.595 Q6.1
NetQ6_3: Q6.3 R8.1 | length 11.9
  Bottom Layer w0.3: Q6.3 28.477,46.545 30.707,48.775 ; R8.1@30.707,57.2 R8.1
  Bottom Layer w1: 30.707,48.775 R8.1@30.707,57.2
NetR3_2: R3.2 R4.1 | length 3.5
  Bottom Layer w1: R4.1 R3.2
NetR8_2: R8.2 R9.1 R10.1 | length 11.2
  Bottom Layer w0.6: R9.1@24.277,60.57 R9.1 R8.2 ; R10.1@25.877,63.27 R10.1
  Bottom Layer w1: R9.1@24.277,60.57 24.277,61.67 R10.1@25.877,63.27
NetR12_2: R12.2 R13.1 R14.1 | length 6.5
  Bottom Layer w0.3: R13.1@22.21,57.111 R14.1@22.21,63.078
  Bottom Layer w0.6: R13.1@22.21,57.111 R13.1
  Bottom Layer w1: R14.1@22.21,63.078 R14.1
NetU1_1: U1.1 X1.1 | length 7.9
  Bottom Layer w0.6: X1.1@-21.15,1.308 X1.1 ; -20.867,2.458 -21.15,2.74 -21.15,7.687 -20.732,8.105 U1.1
  Bottom Layer w0.9: X1.1 -20.867,2.458
NetU1_2: U1.2 X1.2 | length 10
  Bottom Layer w0.6: -22.867,2.458 -22.867,6.725 -22.618,6.975 -22.618,8.542 -21.81,9.35 -20.65,9.35 U1.2
  Bottom Layer w0.9: X1.2 -22.867,2.458
NO1: J1.2 P4.1 P4.2 | length 16.4
  Bottom Layer w2: P4.1 -22.936,64.621 -22.936,67.596 P4.2 -22.16,68.397 -14.506,68.397 -17.529,65.375 -17.89,65.375
NO2: J2.2 P3.1 P3.2 | length 13.8
  Bottom Layer w2: P3.2 P3.1 -22.629,54.409 -19.523,51.303 -14.53,51.303 J2.2
PHASE1: L1.2 P6.1 P6.2 | length 21.2
  Bottom Layer w2: P6.2 P6.1 -14.222,85.17 ; -17.11,88.058 -16.716,87.663 ; -15.789,88.59 -15.789,86.737 -14.222,85.17 ; -14.57,87.245 -14.222,87.245 -13.185,86.207 ; L1.2 -13.546,84.494 -14.222,85.17
PHASE2: J1.5 J2.5 L2.2 P5.1 P5.2 R3.1 | length 78.3
  Bottom Layer w2: P5.2 P5.1 -13.409,74.884 L2.2 -12.109,74.346 -7.814,70.05 -7.814,64.765 ; -9.193,41.485 -9.193,40.803 -7.793,39.403 R3.1 ; -7.814,62.583 -7.814,64.765 ; -7.793,41.485 -7.793,44.303 -6.28,45.816 ; J2.5 -6.111,45.985 -6.28,45.816 ; -7.814,64.765 -5.733,62.685 J1.5 -0.55,62.583 -5.632,62.583 -7.814,60.401 -7.814,47.349 -6.28,45.816
Pin0_1: P0.1 R11.1 | length 16.2
  Bottom Layer w1: P0.1 1.207,33.775 1.207,35.978 4.632,39.403 10.559,39.403 12.641,41.485 R11.1
Pin0_2: P0.2 R7.1 | length 16.7
  Bottom Layer w1: P0.2 3.682,33.689 3.682,35.753 5.582,37.653 11.909,37.653 15.741,41.485 R7.1
Pin0_3: C9.1 D5.1 P0.3 R6.2 | length 30.4
  Bottom Layer w1: D5.1 -17.318,32.578 -16.068,33.828 R6.2 -12.093,33.628 -5.618,33.628 C9.1 -3.393,31.403 6.152,31.403 6.303,31.554 6.303,33.471 P0.3
Pin0_6: BT.0 P0.6 | length 12
  Bottom Layer w1: 21.427,40.645 21.977,40.645 BT.0
  Bottom Layer w1.6: P0.6 14.402,33.62 21.427,40.645
Pin1_2: IC1.31 P1.2 | length 34.5
  Top Layer w0.6: v1(11.598,6.678) 12.2,7.28 12.2,13.914 15,16.714 v1(15,17.029)
  Bottom Layer w0.5: v1@11.764,6.453 11.951,6.266 11.951,4.425
  Bottom Layer w0.55: v1@15.128,16.901 15.128,16.251 IC1.31
  Bottom Layer w0.6: P1.2 P1.2@4.031,-8.385 ; 4.031,-6.721 4.382,-6.37 8.399,-6.37 9.55,-5.219 9.55,0.557 11.951,2.958 11.951,4.425 ; v1(15,17.029) v1@15.128,16.901
  Bottom Layer w0.9: P1.2@4.031,-8.385 4.031,-6.721
Pin1_3: IC1.30 P1.3 | length 36.1
  Top Layer w0.6: v1(10.677,5.144) 10.677,5.326 10.15,5.852 10.15,7.224 10.869,7.942 10.869,14.508 v1(13.275,16.915)
  Bottom Layer w0.55: 14.143,15.468 14.155,15.457 14.791,15.457 IC1.30
  Bottom Layer w0.6: P1.3 P1.3@1.619,-8.078 ; 2.719,-6.978 2.719,-5.572 3.072,-5.219 7.262,-5.219 8.573,-3.908 8.573,1.223 10.677,3.327 v1@10.677,4.649 ; v1(13.275,16.915) 13.275,16.131 13.938,15.468 14.143,15.468
  Bottom Layer w0.9: P1.3@1.619,-8.078 2.719,-6.978
Pin1_4: P1.4 R26.1 U1.7 | length 34.2
  Top Layer w0.5: -13.375,4.525 v1(-13.375,9.375)
  Top Layer w0.7: -13.375,4.525 -14.475,3.425 -14.475,-6.025 -12.124,-8.376 v1(-2.681,-8.376)
  Bottom Layer w0.6: U1.7 -15.185,9.359 -11.54,9.359 R26.1
  Bottom Layer w0.7: v1@-2.533,-8.397 P1.4
Pin2_1: IC1.15 P2.1 R30.2 | length 49.8
  Top Layer w0.6: v1(-0.248,-5.7) -0.247,-5.701 11.671,-5.701 12.85,-4.522 16.7,-4.522 17.636,-5.458 v1(25.779,-5.458)
  Bottom Layer w0.508: 20.055,5.667 IC1.15 19.27,6.441 20.967,4.744 20.967,4.679
  Bottom Layer w0.6: 20.967,-2.611 20.967,4.679
  Bottom Layer w0.7: R30.2@-2.533,-5.652 v1@-0.296,-5.652 ; 20.967,-2.611 21.608,-3.253
  Bottom Layer w0.9: R30.2 R30.2@-2.533,-5.652 ; v1@-0.296,-5.652 v1(-0.248,-5.7) ; 21.608,-3.253 21.92,-3.253 ; 25.779,-4.191 v1(25.779,-5.458) 25.779,-8.376 P2.1
  Bottom Layer w1: 21.92,-3.253 24.841,-3.253 25.779,-4.191
Pin2_2: IC1.16 P2.2 R19.1 | length 32.3
  Top Layer w0.6: v1(7.426,3.41) 9.212,3.41 10.869,1.753 18.164,1.753 v1(19.27,0.647)
  Bottom Layer w0.508: IC1.16 19.871,4.72 19.871,1.454 19.27,0.853 v1(19.27,0.647)
  Bottom Layer w0.6: v1(7.426,3.41) R19.1 ; v1(19.27,0.647) 19.27,0.466 19.909,-0.174 19.909,-3.057 21.474,-4.622
  Bottom Layer w0.8: 21.474,-4.622 22.63,-4.622
  Bottom Layer w0.9: 22.63,-4.622 23.079,-5.07 P2.2@23.079,-8.175
Pin2_3: IC1.17 P2.3 R20.2 | length 38.7
  Top Layer w0.6: v1@2.25,1.025 2.25,-2.174 4.923,-4.847 11.032,-4.847 v1(15.704,-0.175) 15.832,-0.303 16.755,-0.303 18.204,-1.753 v1(18.386,-1.753)
  Bottom Layer w0.6: v1(2.3,1.266) R20.2 ; v1(15.704,-0.175) 15.704,4.937 IC1.17 ; v1(18.386,-1.753) 18.386,-2.826 20.273,-4.713 20.273,-5.499 20.379,-5.604
  Bottom Layer w0.9: 20.379,-5.604 20.379,-8.376 P2.3
Pin7_1: IC1.13 P7.1 | length 87.6
  Bottom Layer w0.53: -21.927,27.457 25.219,27.457 28.265,24.411 28.265,7.926 26.143,5.804 22.208,5.804 20.905,7.106 20.878,7.106 IC1.13
  Bottom Layer w0.7: -23.391,25.993 -21.927,27.457
  Bottom Layer w0.9: P7.1 -25.3,24.084 -23.391,25.993
Pin7_2: IC1.12 P7.2 | length 85.2
  Bottom Layer w0.53: IC1.12 21.226,7.89 21.23,7.89 22.532,6.588 25.472,6.588 27.44,8.556 27.44,23.602 24.404,26.638
  Bottom Layer w0.6: -23.391,17.354 -23.391,23.887 -20.64,26.638 24.404,26.638
  Bottom Layer w0.9: P7.2 -25.132,16.288 -24.456,16.288 -23.391,17.354
Pin7_6: C14.2 P7.6 U1.3 | length 10.6
  Bottom Layer w0.6: P7.6 -23.63,7.631 -23.63,8.874 -22.618,9.886 -22.618,10.37 -22.343,10.645 U1.3
  Bottom Layer w0.8: C14.2 P7.6
RESET: C4.2 IC1.29 IC?.4@48.999,12.55 P2.4 R17.2 | length 27.9
  Top Layer w0.6: v1(17.636,4.203) 17.636,5.852 19.27,7.486 v1(19.27,9.104)
  Bottom Layer w0.6: IC1.29 16.972,12.145 17.664,12.145 18.45,11.359 18.45,9.903 v1@19.093,9.26 ; P2.4@17.594,-8.291 P2.4 ; R17.2@17.594,-5.176 R17.2 16.972,-4.554 16.972,-0.88 17.636,-0.216 v1(17.636,4.203)
  Bottom Layer w0.9: P2.4@17.594,-8.291 R17.2@17.594,-5.176 ; C4.2 17.682,-10.504 17.682,-8.415 P2.4
SDA: IC1.22 IC1.27 P7.3 R29.1 U1.5 | length 127.3
  Top Layer w0.53: v1(15.349,11.508) 16.51,12.669 16.51,13.266 19.8,16.556 19.8,23.855 20.848,24.903 24.24,24.903 v1(24.64,24.503)
  Bottom Layer w0.53: -24.004,13.671 -22.343,15.332 -22.343,23.25 -19.773,25.819 23.324,25.819 v1(24.64,24.503) ; R29.1 -14.159,20.494 -13.848,20.184 -13.848,17.066 -12.775,15.993 -12.775,15.514 -12.093,14.831 ; U1.5 -15.141,11.975 -14.084,11.975 -12.775,13.284 -12.775,14.215 -12.159,14.831 -12.093,14.831 ; IC1.27 12.028,14.825 -12.087,14.825 -12.093,14.831
  Bottom Layer w0.6: IC1.22 15.221,10.112 15.221,11.38 v1(15.349,11.508) 15.345,11.508 IC1.27
  Bottom Layer w0.9: P7.3 -25.223,13.503 -23.718,13.503 -22.343,14.878 -22.343,14.919
VCC: C7.1 C8.2 C10.2 C12.2 D12.1 IC1.4 IC1.6 IC1.18 IC?.1@48.999,14.95 IC?.2@41.725,22.95 IC?.4@48.425,22.95 IC?.5 IC?.17 P0.5 P2.5 P7.5 R17.1 R28.2 R29.2 | length 168.4
  Top Layer w0.6: v1(-25.3,-6.37) -25.3,1.775 -22.774,4.301 v1(-22.774,12.068) ; v1(16.972,8.726) 19.401,11.155 v1(20.012,11.155) ; v1(21.754,15.504) 21.337,15.92 21.337,22.919 v1@21.921,23.503
  Top Layer w0.7: v1@7.925,-10.422 v1(7.925,-10.222) 7.925,-7.995 9.092,-6.828 v1(14.833,-6.828)
  Bottom Layer w0.6: v1(-25.3,-6.37) -20.47,-11.2 2.341,-11.2 2.91,-10.631 7.816,-10.631 v1@7.925,-10.522 ; P7.5 -23.63,10.171 -23.63,11.213 v1(-22.774,12.068) -21.568,13.274 -20.117,13.274 -19.595,13.796 -19.595,14.731 -19.689,14.825 -20.005,14.825 -19.847,14.983 D12.1 -19.289,15.541 -19.289,16.931 -18.555,17.666 R28.2 R29.2 ; R17.1@14.833,-5.216 R17.1 14.72,-5.038 14.72,-1.397 14.206,-0.883 14.206,0.466 14.72,0.98 14.72,5.085 IC1.18 17.261,7.626 17.261,8.249 v1@16.972,8.539 ; v1(20.012,11.155) 20.012,11.508 IC1.6 22.535,14.031 22.535,14.726 21.757,15.504 v1(21.754,15.504) 21.718,15.468 21.709,15.468 IC1.4 ; C10.2@20.243,24.102 C10.2 20.08,23.603 20.13,23.653 20.43,23.353 v1(21.907,23.353)
  Bottom Layer w0.7: v1(7.925,-10.222) 8.034,-10.331 9.609,-10.331 C12.2
  Bottom Layer w0.9: R17.1@14.833,-5.216 v1(14.833,-6.828) 14.904,-6.898 14.904,-8.301 P2.5
  Bottom Layer w1: P0.5 12.001,33.471 12.001,32.064 12.586,31.478 24.057,31.478 ; 33.052,47.195 33.72,47.863 33.745,47.863 34.552,48.67 34.652,48.67 C8.2 C7.1
  Bottom Layer w1.4: 33.052,40.472 33.052,47.195
  Bottom Layer w2: 24.057,31.478 33.052,40.472
VDD: C5.1 D2.1 D4.1 R10.2 R14.2 R16.2 | length 67.5
  Bottom Layer w1: D4.1 19.107,79.895 19.882,80.67 19.882,88.995 18.632,90.245 ; D2.1 18.632,90.245 ; R16.2 22.152,65.82 R14.2 R10.2 26.077,66.07 26.377,66.37 26.377,66.47 33.552,73.645 C5.1 33.552,89.234 31.857,90.928 21.732,90.928 21.049,90.245 18.632,90.245
pads on no net: DS1.1 IC1.19 IC1.32 IC?.2@48.999,14.15 IC?.3@48.999,13.35 IC?.6 IC?.7 IC?.8 IC?.9 IC?.10 IC?.11 IC?.12 IC?.13 IC?.14 IC?.15 IC?.18 IC?.19 IC?.20 IC?.21 IC?.22 IC?.23 IC?.24 IC?.25 IC?.26 IC?.27 IC?.28 IC?.29 IC?.30
copper on no net: | length 54.4
  Bottom Layer w0.53: -0.248,16.733 0.103,16.382 10.906,16.382
  Bottom Layer w0.6: -0.331,18.603 -0.248,18.52 -0.248,16.733 ; 4.719,18.703 10.664,18.703 12.239,20.278 21.101,20.278 24.143,17.236 24.143,13.376 22.664,11.897 ; 10.906,16.382 13.044,18.52 19.909,18.52 20.578,17.851 20.578,16.6 19.27,15.291

## Polygon pours and split planes (outlines as drawn)
GND on Bottom Layer "GND_L02_P008" (solid, pour order 8): -28.698,29.078 -28.698,93.584 50.052,93.584 50.052,29.078
no net on Bottom Layer "Bottom Layer-No Net" (solid, pour order 12): -28.406,28.103
no net on Bottom Layer "Bottom Layer-No Net 1" (solid, pour order 10): -28.406,28.103 -28.406,-12.897
GND on Top Layer "GND_L01_P014" (solid, remove dead copper, pour order 14): -28.406,-12.897 -28.406,28.103 39.894,28.103 39.894,-12.897

## Keep-outs
Keep-Out Layer:
  lines w0.254: -28.698,29.078 -28.698,93.584 50.052,93.584 50.052,29.078 -28.693,29.078 ; -28.406,-12.897 -28.406,28.103 39.894,28.103 39.894,-12.897 -28.406,-12.897

## Other copper
Bottom Layer:
  rectangle net Pin0_3: -20.773,31.453 -16.068,33.028
  rectangle net VCC: 24.875,30.575 25.477,31.478
  rectangle net VCC: 32.382,39.629 33.598,45.085
  region net VCC: 23.344,31.726 24.527,30.575 33.337,39.629 32.155,40.78
  region net VDD: 18.069,69.226 18.152,69.528 18.02,69.564 17.937,69.262
  rectangle net VDD: 18.152,69.203 18.457,69.528
  rectangle net VDD: 18.152,68.978 21.472,69.778
  rectangle net VDD: 21.272,69.203 27.552,70.453
  rectangle net VDD: 17.807,65.27 25.002,69.528
  rectangle net VDD: 20.452,70.178 30.657,71.378
  rectangle net VDD: 18.152,65.27 26.877,65.82
  rectangle net GND: 33.598,58.71 35.502,59.474
  region net GND: 36.103,58.635 35.685,58.27 36.413,57.438 36.831,57.803
  rectangle net GND: 36.207,51.353 39.182,63.119
  rectangle net NetC2_1: 1.508,77.378 3.857,79.12
  rectangle net NetC2_1: -2.418,81.278 -0.304,83.51
  region net NetC2_2: 25.767,87.888 27.824,86.287 28.857,87.616 26.8,89.216
  rectangle net NetC2_2: 26.877,86.172 28.857,87.616
  rectangle net NetC2_2: 21.777,86.628 27.907,87.561
  rectangle net NetC2_2: 21.777,87.561 22.977,89.47
  rectangle net NetC2_2: 14.352,73.645 22.977,75.684
  rectangle net NetC2_2: 21.777,75.628 28.857,87.028
  rectangle net NetD7_1: 13.856,54.892 16.107,56.456
  region net NetD7_1: 12.977,56.076 14.991,54.885 15.87,56.37 13.856,57.561
  rectangle net NetD7_1: 5.166,55.671 14.549,60.257
  region net NetD6_2: 5.4,46.39 6.089,47.02 4.654,48.59 3.965,47.96
  rectangle net NetD6_2: 5.582,46.345 5.898,46.545
  rectangle net NetD6_2: 3.861,47.224 5.902,48.306
  region net NetD6_2: 2.328,48.942 3.861,47.224 5.451,48.643 3.919,50.361
  region net NetD6_2: 3.571,47.62 5.439,49.387 2.141,52.872 0.274,51.104
  rectangle net NetD7_1: 4.127,57.111 5.612,58.185
  region net NetD7_1: 1.853,55.777 6.849,59.277 5.612,61.043 0.616,57.542
  region net NetC6_1: 5.473,63.81 6.815,64.939 3.24,69.187 1.899,68.058
  rectangle net VDD: 19.552,89.47 20.208,90.245
  region net VDD: 20.402,88.328 21.335,89.866 20.301,90.494 19.368,88.956
  region net NO2: -20.773,54.257 -19.091,51.608 -16.343,53.353 -18.025,56.002
  rectangle net NO2: -18.456,50.287 -12.157,53.919
  rectangle net NO2: -24.552,52.598 -17.89,59.126
  rectangle net NO1: -24.603,68.685 -22.16,69.388
  rectangle net NO1: -24.629,62.962 -16.78,69.337
  rectangle net PHASE2: -7.818,39.009 -6.772,41.955
  rectangle net PHASE2: -10.176,40.711 -7.814,71.124
  rectangle net PHASE2: -19.523,73.147 -11.79,74.027
  rectangle net PHASE2: -18.491,77.945 -14.57,79.624
  region net PHASE2: -15.769,78.611 -13.565,76.002 -12.366,77.015 -14.57,79.624
  region net PHASE2: -17.89,77.822 -15.1,74.569 -12.999,76.371 -15.789,79.624
  region net PHASE2: -22.665,77.035 -20.319,73.272 -16.12,75.89 -18.466,79.653
  rectangle net PHASE2: -24.629,73.147 -18.456,79.624
  rectangle net PHASE1: -16.716,88.209 -14.773,89.809
  rectangle net PHASE1: -15.789,83.51 -13.884,87.245
  rectangle net PHASE1: -17.771,83.51 -14.57,88.181
  rectangle net PHASE1: -24.603,83.51 -16.297,89.809
  rectangle net PHASE2: -8.804,44.485 -6.268,47.178
  region net SDA: -11.174,14.653 -12.058,14.653 -12.998,13.713 -12.998,12.697
  region net SDA: -12.45,16.274 -13.65,17.474 -13.848,17.474 -13.848,17.066 -12.775,15.993 -12.775,15.841
  region net SDA: -12.45,16.274
  region net SDA: -13.275,16.375 -13.275,16.775 -13.312,16.811
  region net SDA: -13.261,16.389 -13.261,12.489 -13.234,12.461 -12.761,12.933 -12.761,16.288 -13.03,16.557
  region net SDA: -12.338,14.653 -12.775,14.215
  region net SDA: -12.775,16.275 -12.761,16.288 -12.775,15.993 -12.45,16.274 -11.001,14.825 -11.174,14.653 -12.338,14.653
  region net SDA: -12.775,15.894 -12.775,15.787 -12.882,15.894
  region net SDA: -12.775,15.894 -12.775,14.215 -12.742,14.215 -12.126,14.831
  region net Pin0_3: -16.368,32.303 -15.243,33.428 -15.668,33.428 -16.068,33.828
  region net VCC: 24.057,30.553 28.057,30.553 32.482,34.978
  region net VCC: 24.382,31.478
  region net VCC: 24.407,31.128 28.632,31.128 33.857,36.353 33.857,40.478
  region net VCC: 33.857,40.478 29.032,35.653 29.032,32.228
  region net VCC: 24.407,31.128 25.343,32.064 29.457,32.064 29.457,35.285 33.802,39.629
  region net VCC: 33.857,40.478
  region net VCC: 33.052,40.472
  region net VDD: 17.78,69.528 22.302,69.528 22.632,69.198 20.44,71.389
  region: 18.457,69.203
  region net VDD: 31.532,72.153 25.623,66.243 17.965,66.243
  region: 23.307,70.178
  region net Pin0_6: 23.132,34.028 21.835,32.731 14.102,32.731 14.102,33.942 13.766,34.278
  region net Pin0_6: 22.827,41.495 23.132,41.189 23.132,34.028 14.51,34.028 14.102,33.62
  region: 33.707,60.828
  region net GND: 36.345,61.963 37.033,61.963 37.033,58.951 36.552,58.47 36.552,58.07 35.867,58.07 34.159,59.777
  region net NetC2_1: 4.801,86.87 3.748,87.924 1.978,87.924 -5.632,80.745
  region net NetC2_1: 3.232,85.253 3.054,85.432 3.054,86.045 3.063,86.045 3.646,86.628
  region net NetC2_1: 3.807,78.803 1.395,78.803 -1.396,81.595 3.054,86.045 4.238,86.045
  region net NetC2_1: 3.389,86.207 -0.373,82.445 -0.234,82.445 -0.284,82.495 -3.82,82.495
  region net NetC2_2: 26.005,87.801 26.543,87.801 26.783,87.561 26.424,87.201 26.424,87.028 26.557,87.028
  region net NetC2_2: 26.332,88.053 26.332,87.119 26.424,87.028 26.309,87.028
  region net NetC2_2: 26.382,87.553 26.382,87.643 26.465,87.561 26.783,87.561 26.467,87.245 26.151,87.561 25.877,87.561 25.877,87.799 25.627,88.049
  region net NetC2_2: 24.127,84.743
  region net NetC2_2: 28.857,87.616 27.066,89.47 21.777,89.47